# EAGLE board somador & subtrator (EAGLE 9.7.0)

Size 547.56 x 177.02 mm. Coordinates in mm from the lower left corner, seen from the top.
Outline: 0,0 547.55,0 547.55,177.02 0,177.02 0,0
Copper layers (1*16): Top 0.035mm / dielectric 1.5mm / Bottom 0.035mm
Design rules "default": minimum track width 6mil, minimum drill 0.35mm, track to track 6mil, track to pad 6mil, pad to pad 6mil, via to via 6mil, smd to smd 6mil, copper to edge 40mil, drill to drill 6mil, minimum pad ring 10mil, minimum via ring 8mil, stop-mask expansion 4mil, vias tented up to drill 0mil, thermal gap 10mil

## Footprints (pad centres in the part's own frame; a part is rotated, then mirrored left to right if it is on the bottom)
LEDRD254W60D565H860B = drill 0.981 pad 1.581: 1 -1.27,0; 2 1.27,0
BATTERY-GENERIC = drill 1.118 pad 3.15 octagon: + 2.54,0; - -2.54,0
RESAD1016W63L850D250B = drill 0.83 pad 1.43: 1 -5.08,0; 2 5.08,0
78B04ST = drill 0.8: 1 -3.81,-3.81; 2 -1.27,-3.81; 3 1.27,-3.81; 4 3.81,-3.81; 5 3.81,3.81; 6 1.27,3.81; 7 -1.27,3.81; 8 -3.81,3.81
78F01T = drill 0.8: 1 -1.27,-3.81; 2 1.27,-3.81; 3 1.27,3.81; 4 -1.27,3.81
DIP762W53P254L1969H508Q14B = drill 0.743 pad 1.343: 1 -3.81,7.62; 2 -3.81,5.08; 3 -3.81,2.54; 4 -3.81,0; 5 -3.81,-2.54; 6 -3.81,-5.08; 7 -3.81,-7.62; 8 3.81,-7.62; 9 3.81,-5.08; 10 3.81,-2.54; 11 3.81,0; 12 3.81,2.54; 13 3.81,5.08; 14 3.81,7.62

## Placement (x,y rotation side)
D1  RED  [LEDRD254W60D565H860B]  241.88,24.21 180 top
D2  RED  [LEDRD254W60D565H860B]  231.72,24.21 180 top
D3  RED  [LEDRD254W60D565H860B]  221.56,24.21 180 top
D4  RED  [LEDRD254W60D565H860B]  208.86,24.21 180 top
D7  RED  [LEDRD254W60D565H860B]  183.46,24.21 180 top
P1  BATTERYGENERIC  [BATTERY-GENERIC]  8.26,73.82 180 top
R1  470  [RESAD1016W63L850D250B]  222.83,11.51 90 top
R2  10k  [RESAD1016W63L850D250B]  229.49,129.93 90 top
R3  470  [RESAD1016W63L850D250B]  232.99,11.51 90 top
R4  470  [RESAD1016W63L850D250B]  243.15,11.51 90 top
R5  470  [RESAD1016W63L850D250B]  184.73,8.97 90 top
R6  10k  [RESAD1016W63L850D250B]  226.95,129.93 90 top
R7  10k  [RESAD1016W63L850D250B]  224.41,129.93 90 top
R8  10k  [RESAD1016W63L850D250B]  221.87,129.93 90 top
R9  10k  [RESAD1016W63L850D250B]  209.17,129.93 90 top
R10  470  [RESAD1016W63L850D250B]  210.13,11.51 90 top
R12  10k  [RESAD1016W63L850D250B]  239.65,129.93 90 top
R13  10k  [RESAD1016W63L850D250B]  206.63,129.93 90 top
R14  10k  [RESAD1016W63L850D250B]  204.09,129.93 90 top
R15  10k  [RESAD1016W63L850D250B]  211.71,127.39 90 top
SW1  SPST-478B04ST  [78B04ST]  207.9,146.44 0 top
SW2  SPST-478B04ST  [78B04ST]  225.68,146.44 0 top
SW3  DPST78F01T  [78F01T]  240.92,146.44 0 top
U1  74HC86_PDIP  [DIP762W53P254L1969H508Q14B]  239.51,77.91 90 top
U2  74HC08_PDIP  [DIP762W53P254L1969H508Q14B]  219.19,77.91 90 top
U3  74HC32_PDIP  [DIP762W53P254L1969H508Q14B]  198.87,77.91 90 top
U4  74HC32_PDIP  [DIP762W53P254L1969H508Q14B]  377.53,169.36 90 top
U5  74HC08_PDIP  [DIP762W53P254L1969H508Q14B]  397.85,169.36 90 top
U6  74HC86_PDIP  [DIP762W53P254L1969H508Q14B]  418.17,169.36 90 top
U7  74HC08_PDIP  [DIP762W53P254L1969H508Q14B]  411.72,91.54 90 top
U8  74HC86_PDIP  [DIP762W53P254L1969H508Q14B]  432.04,91.54 90 top
U9  74HC32_PDIP  [DIP762W53P254L1969H508Q14B]  391.4,91.54 90 top
U13  74HC32_PDIP  [DIP762W53P254L1969H508Q14B]  491.99,123.46 90 top
U14  74HC08_PDIP  [DIP762W53P254L1969H508Q14B]  512.31,123.46 90 top
U15  74HC86_PDIP  [DIP762W53P254L1969H508Q14B]  532.63,123.46 90 top

## Library data of the parts
D1-D4 D7 = Tinkercad; CATEGORY: Opto-Electronic; SUB-CATEGORY: LED; VALUE: LED_RED
P1 R1-R10 R12-R15 SW1-SW3 U1-U9 U13-U15 = Tinkercad

## Nets
D1_A: D1.1 R4.2
D2_A: D2.1 R3.2
D3_A: D3.1 R1.2
D4_A: D4.1 R10.2
D7_A: D7.1 R5.2
P1+: P1.+ SW1.5 SW1.6 SW1.7 SW1.8 SW2.5 SW2.6 SW2.7 SW2.8 SW3.4 U1.14 U2.14 U3.14 U4.14 U5.14 U6.14 U7.14 U8.14 U9.14 U13.14 U14.14 U15.14
P1-: D1.2 D2.2 D3.2 D4.2 D7.2 P1.- R2.1 R6.1 R7.1 R8.1 R9.1 R12.1 R13.1 R14.1 R15.1 U1.7 U2.7 U3.7 U4.7 U5.7 U6.7 U7.7 U8.7 U9.7 U13.7 U14.7 U15.7
U1_1Y: R4.1 U1.3
U1_3A: R15.2 SW1.4 U1.9 U2.13
U1_3Y: U1.2 U1.8 U2.10
U1_4A: R2.2 SW2.4 U1.12
U1_4B: R12.2 SW3.1 U1.1 U1.13 U2.9 U6.13 U8.13 U15.13
U2_3Y: U2.8 U3.12
U2_4A: U1.10 U1.11 U2.12
U2_4Y: U2.11 U3.13
U3_4Y: U3.11 U5.9 U6.1
U4_4Y: U4.11 U7.9 U8.1
U5_3Y: U4.12 U5.8
U5_4Y: U4.13 U5.11
U6_1Y: R3.1 U6.3
U6_3A: R9.2 SW1.3 U5.13 U6.9
U6_3B: U5.12 U6.10 U6.11
U6_3Y: U5.10 U6.2 U6.8
U6_4A: R6.2 SW2.3 U6.12
U7_3Y: U7.8 U9.12
U7_4Y: U7.11 U9.13
U8_1Y: R1.1 U8.3
U8_3A: R13.2 SW1.2 U7.13 U8.9
U8_3B: U7.12 U8.10 U8.11
U8_3Y: U7.10 U8.2 U8.8
U8_4A: R7.2 SW2.2 U8.12
U9_4Y: U9.11 U14.9 U15.1
U13_4Y: R5.1 U13.11
U14_3B: U14.10 U15.2 U15.8
U14_3Y: U13.12 U14.8
U14_4A: U14.12 U15.10 U15.11
U14_4Y: U13.13 U14.11
U15_1Y: R10.1 U15.3
U15_3A: R14.2 SW1.1 U14.13 U15.9
U15_4A: R8.2 SW2.1 U15.12

## Tracks (layer width: path | path; a pad name or v marks a point on that pad's centre or on a via)
D1_A  (1 unrouted)
D2_A  (1 unrouted)
D3_A  (1 unrouted)
D4_A  (1 unrouted)
D7_A  (1 unrouted)
P1+  (21 unrouted)
P1-  (26 unrouted)
U1_1Y  (1 unrouted)
U1_3A  (3 unrouted)
U1_3Y  (2 unrouted)
U1_4A  (2 unrouted)
U1_4B  (7 unrouted)
U2_3Y  (1 unrouted)
U2_4A  (2 unrouted)
U2_4Y  (1 unrouted)
U3_4Y  (2 unrouted)
U4_4Y  (2 unrouted)
U5_3Y  (1 unrouted)
U5_4Y  (1 unrouted)
U6_1Y  (1 unrouted)
U6_3A  (3 unrouted)
U6_3B  (2 unrouted)
U6_3Y  (2 unrouted)
U6_4A  (2 unrouted)
U7_3Y  (1 unrouted)
U7_4Y  (1 unrouted)
U8_1Y  (1 unrouted)
U8_3A  (3 unrouted)
U8_3B  (2 unrouted)
U8_3Y  (2 unrouted)
U8_4A  (2 unrouted)
U9_4Y  (2 unrouted)
U13_4Y  (1 unrouted)
U14_3B  (2 unrouted)
U14_3Y  (1 unrouted)
U14_4A  (2 unrouted)
U14_4Y  (1 unrouted)
U15_1Y  (1 unrouted)
U15_3A  (3 unrouted)
U15_4A  (2 unrouted)